# EAGLE board revA (EAGLE 9.6.2), part 1 of 2
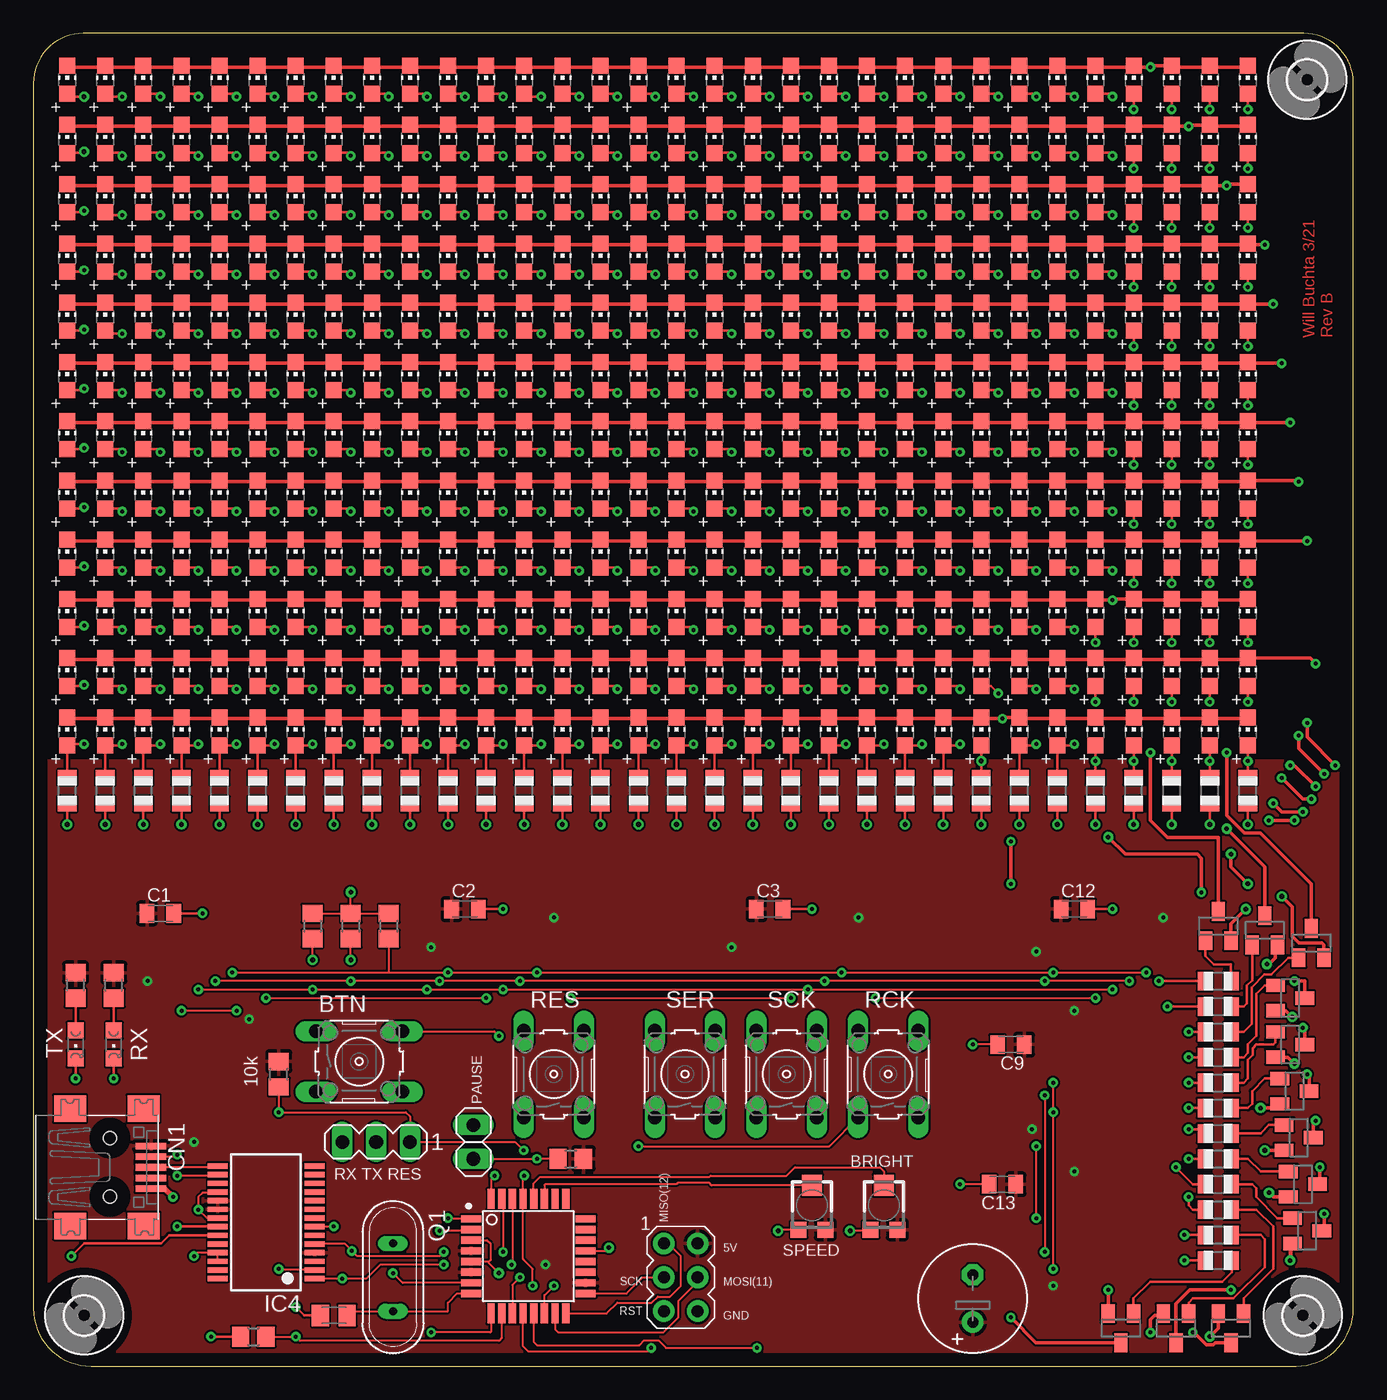
[diagram p0: board, top side]
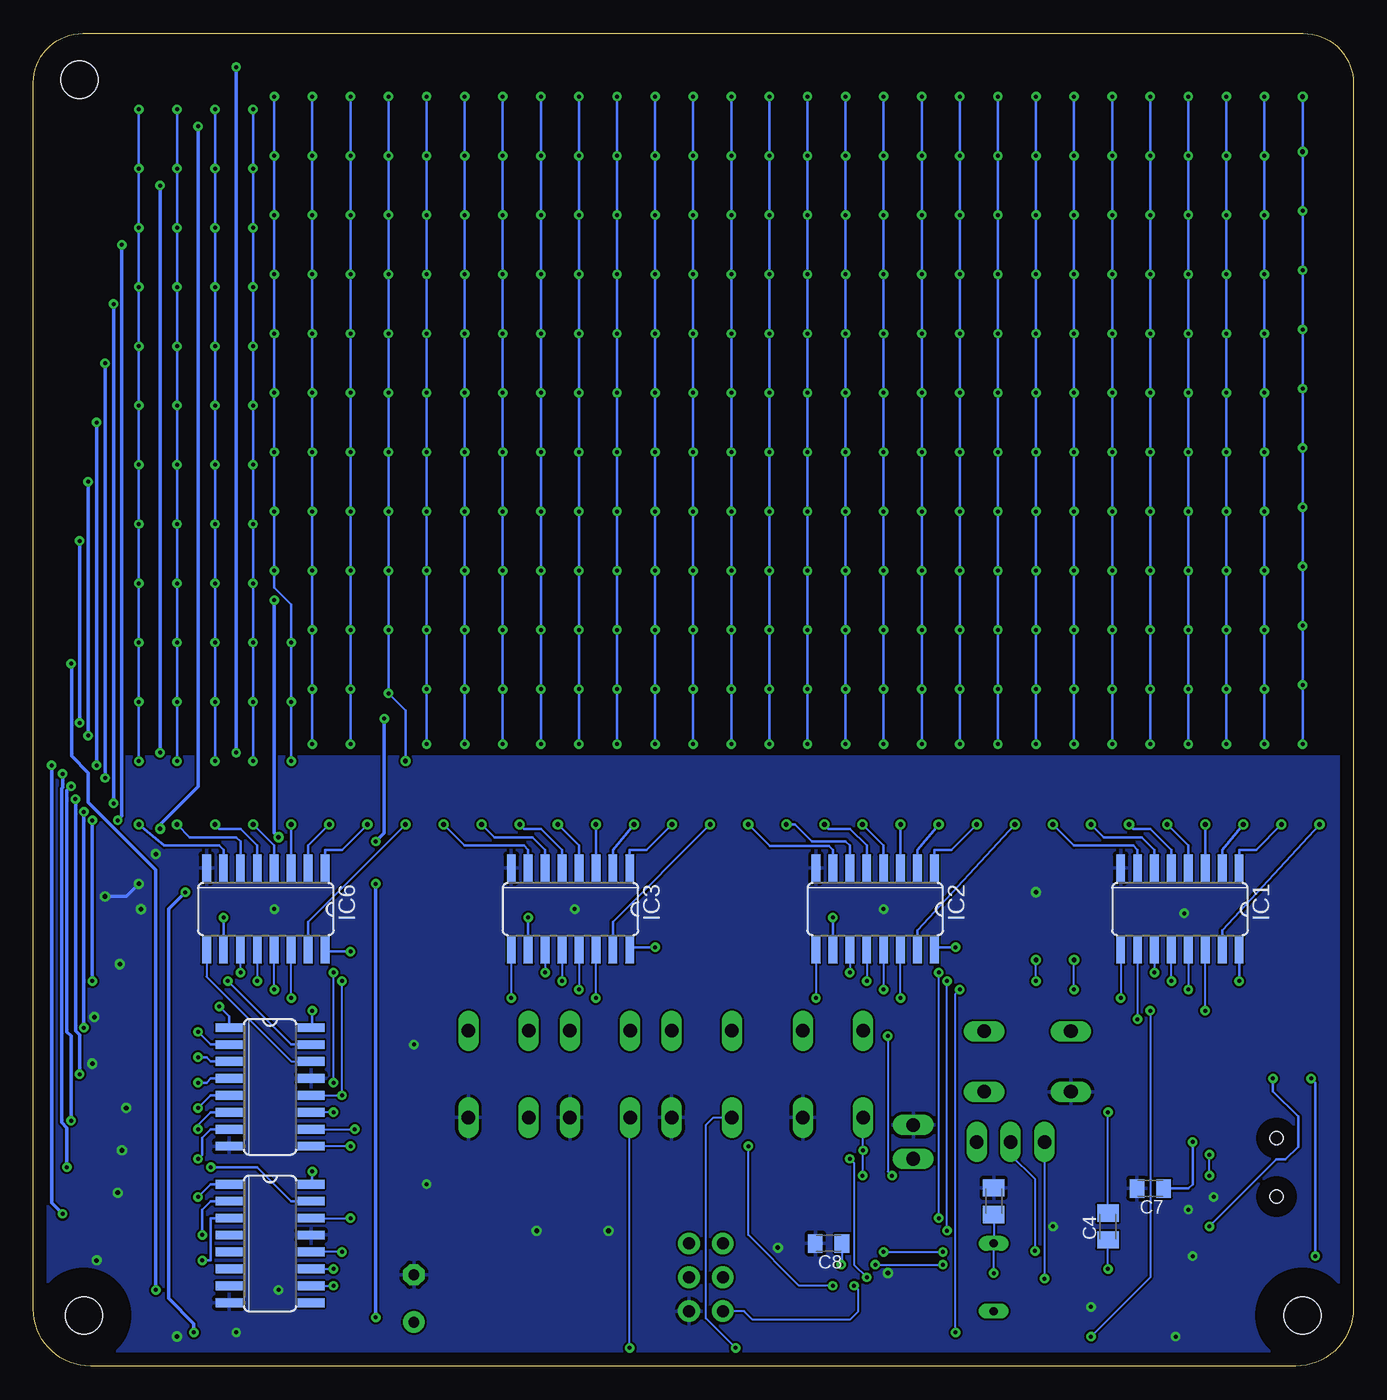
[diagram p1: board, bottom side, seen from below]

Size 99.04 x 100 mm. Coordinates in mm from the lower left corner, seen from the top.
Outline: 0,96.25 0,4.34 arc90 4.34,0 94.74,0 arc90 99.04,4.3 99.04,96.28 arc90 95.32,100 3.75,100 arc90 0,96.25
Copper layers (1*16): Top 0.035mm / dielectric 1.5mm / Bottom 0.035mm
Design rules "default *": minimum track width 6mil, minimum drill 0.3mm, track to track 6mil, track to pad 8mil, pad to pad 5mil, via to via 6mil, smd to smd 5mil, copper to edge 40mil, drill to drill 6mil, minimum pad ring 10mil, minimum via ring 8mil, stop-mask expansion 4mil, vias tented up to drill 0mil, thermal gap 10mil

## Footprints (pad centres in the part's own frame; a part is rotated, then mirrored left to right if it is on the bottom)
TC33X = smd 1.2 x 1.2: 1 -1,-1.825; 3 1,-1.825 | smd 1.5 x 1.6: 2 0,1.5
B3F-10XX = drill 1.016 long: 1 -3.251,2.261; 2 3.251,2.261; 3 -3.251,-2.261; 4 3.251,-2.261
C0805K = smd 1.1 x 1.4: 1 -1,0; 2 1,0
C0805K' = smd 1.3 x 1.6: 1 -1,0; 2 1,0
E3,5-8 = drill 0.813 pad 1.6: + -1.778,0 | drill 0.813 pad 1.6 octagon: - 1.778,0
USB-MINIB = smd 0.5 x 2.308: D+ 0,4.064; D- -0.8,4.064; GND 1.6,4.064; ID 0.8,4.064; VBUS -1.6,4.064 | smd 2 x 2.4: GND1 -4.4,-2; GND2 -4.4,3.5; GND3 4.4,3.5; GND4 4.4,-2 | hole 1: -2.2,1; 2.2,1
2,8 = hole 2.8: 0,0
SO16 = smd 0.66 x 2.032: 1 -4.445,-3.073; 2 -3.175,-3.073; 3 -1.905,-3.073; 4 -0.635,-3.073; 5 0.635,-3.073; 6 1.905,-3.073; 7 3.175,-3.073; 8 4.445,-3.073; 9 4.445,3.073; 10 3.175,3.073; 11 1.905,3.073; 12 0.635,3.073; 13 -0.635,3.073; 14 -1.905,3.073; 15 -3.175,3.073; 16 -4.445,3.073
SSOP28 = smd 0.4 x 1.5: 1 -4.225,-3.625; 2 -3.575,-3.625; 3 -2.925,-3.625; 4 -2.275,-3.625; 5 -1.625,-3.625; 6 -0.975,-3.625; 7 -0.325,-3.625; 8 0.325,-3.625; 9 0.975,-3.625; 10 1.625,-3.625; 11 2.275,-3.625; 12 2.925,-3.625; 13 3.575,-3.625; 14 4.225,-3.625; 15 4.225,3.625; 16 3.575,3.625; 17 2.925,3.625; 18 2.275,3.625; 19 1.625,3.625; 20 0.975,3.625; 21 0.325,3.625; 22 -0.325,3.625; 23 -0.975,3.625; 24 -1.625,3.625; 25 -2.275,3.625; 26 -2.925,3.625; 27 -3.575,3.625; 28 -4.225,3.625
AVRISP = drill 0.9 pad 1.626: 1 -1.27,2.54; 2 1.27,2.54; 3 -1.27,0; 4 1.27,0; 5 -1.27,-2.54; 6 1.27,-2.54
CHIP-LED0805 = smd 1.2 x 1.2: A 0,-1.05; C 0,1.05
1X02 = drill 1.016 long: 1 -1.27,0; 2 1.27,0
QS = drill 0.61 long: 1 -2.54,0; 2 2.54,0
SOT23 = smd 1 x 1.4: 1 -0.95,-1.1; 2 0.95,-1.1; 3 0,1.1
R0805 = smd 1.1 x 1.4: 1 -1,0; 2 1,0
R0805' = smd 1.3 x 1.5: 1 -0.95,0; 2 0.95,0
CHIPLED_0805 = smd 1.2 x 1.2: A 0,-1.05; C 0,1.05
MA03-1 = drill 1.016 long: 1 -2.54,0; 2 0,0; 3 2.54,0
QFP80P900X900X120-32N = smd 1.5 x 0.55: 1 -4.3,2.8; 2 -4.3,2; 3 -4.3,1.2; 4 -4.3,0.4; 5 -4.3,-0.4; 6 -4.3,-1.2; 7 -4.3,-2; 8 -4.3,-2.8; 17 4.3,-2.8; 18 4.3,-2; 19 4.3,-1.2; 20 4.3,-0.4; 21 4.3,0.4; 22 4.3,1.2; 23 4.3,2; 24 4.3,2.8 | smd 0.55 x 1.5: 9 -2.8,-4.3; 10 -2,-4.3; 11 -1.2,-4.3; 12 -0.4,-4.3; 13 0.4,-4.3; 14 1.2,-4.3; 15 2,-4.3; 16 2.8,-4.3; 25 2.8,4.3; 26 2,4.3; 27 1.2,4.3; 28 0.4,4.3; 29 -0.4,4.3; 30 -1.2,4.3; 31 -2,4.3; 32 -2.8,4.3

## Placement (x,y rotation side)
BRIGHT  [TC33X]  63.82,12.06 0 top
BTN  [B3F-10XX]  24.45,22.86 0 top
C1  0.1u  [C0805K]  9.53,33.97 0 top
C2  0.1u  [C0805K]  32.38,34.29 0 top
C3  0.1u  [C0805K]  55.24,34.29 0 top
C4  0.1  [C0805K']  18.41,10.48 90 bottom
C5  18pf  [C0805K']  26.99,12.38 90 bottom
C6  18pf  [C0805K']  22.54,3.81 180 top
C7  0.1u  [C0805K]  15.24,13.34 180 bottom
C8  0.1u  [C0805K]  39.37,9.21 180 bottom
C9  0.1u  [C0805K]  73.34,24.13 180 top
C10  680  [E3,5-8]  70.48,5.08 90 top
C12  0.1u  [C0805K]  78.11,34.29 0 top
C13  0.1u  [C0805K]  72.71,13.65 180 top
CN1  [USB-MINIB]  4.76,14.92 270 top
H1  MOUNT-HOLE2.8  [2,8]  95.57,96.52 0 top
H2  MOUNT-HOLE2.8  [2,8]  3.81,3.81 0 top
H3  MOUNT-HOLE2.8  [2,8]  95.25,3.81 0 top
IC1  74HC595D  [SO16]  13.02,34.29 180 bottom
IC2  74HC595D  [SO16]  35.88,34.29 180 bottom
IC3  74HC595D  [SO16]  58.74,34.29 180 bottom
IC4  FT232RL  [SSOP28]  17.46,10.79 90 top
IC5  74HC595D  [SO16]  81.28,20.95 270 bottom
IC6  74HC595D  [SO16]  81.6,34.29 180 bottom
IC7  74HC595D  [SO16]  81.28,9.21 270 bottom
ISP1  AVRISP-6  [AVRISP]  48.58,6.67 0 top
LED1  [CHIP-LED0805]  2.54,96.52 0 top
LED2  [CHIP-LED0805]  5.4,96.52 0 top
LED3  [CHIP-LED0805]  8.26,96.52 0 top
LED4  [CHIP-LED0805]  11.11,96.52 0 top
LED5  [CHIP-LED0805]  13.97,96.52 0 top
LED6  [CHIP-LED0805]  16.83,96.52 0 top
LED7  [CHIP-LED0805]  19.68,96.52 0 top
LED8  [CHIP-LED0805]  22.54,96.52 0 top
LED9  [CHIP-LED0805]  25.4,96.52 0 top
LED10  [CHIP-LED0805]  28.26,96.52 0 top
LED11  [CHIP-LED0805]  31.11,96.52 0 top
LED12  [CHIP-LED0805]  33.97,96.52 0 top
LED13  [CHIP-LED0805]  36.83,96.52 0 top
LED14  [CHIP-LED0805]  39.69,96.52 0 top
LED15  [CHIP-LED0805]  42.55,96.52 0 top
LED16  [CHIP-LED0805]  45.4,96.52 0 top
LED17  [CHIP-LED0805]  48.26,96.52 0 top
LED18  [CHIP-LED0805]  51.12,96.52 0 top
LED19  [CHIP-LED0805]  53.98,96.52 0 top
LED20  [CHIP-LED0805]  56.83,96.52 0 top
LED21  [CHIP-LED0805]  59.69,96.52 0 top
LED22  [CHIP-LED0805]  62.55,96.52 0 top
LED23  [CHIP-LED0805]  65.41,96.52 0 top
LED24  [CHIP-LED0805]  68.26,96.52 0 top
LED25  [CHIP-LED0805]  71.12,96.52 0 top
LED26  [CHIP-LED0805]  73.98,96.52 0 top
LED27  [CHIP-LED0805]  76.83,96.52 0 top
LED28  [CHIP-LED0805]  79.69,96.52 0 top
LED29  [CHIP-LED0805]  82.55,96.52 0 top
LED30  [CHIP-LED0805]  85.41,96.52 0 top
LED31  [CHIP-LED0805]  88.27,96.52 0 top
LED32  [CHIP-LED0805]  91.12,96.52 0 top
LED33  [CHIP-LED0805]  2.54,92.08 0 top
LED34  [CHIP-LED0805]  5.4,92.08 0 top
LED35  [CHIP-LED0805]  8.26,92.08 0 top
LED36  [CHIP-LED0805]  11.11,92.08 0 top
LED37  [CHIP-LED0805]  13.97,92.08 0 top
LED38  [CHIP-LED0805]  16.83,92.08 0 top
LED39  [CHIP-LED0805]  19.68,92.08 0 top
LED40  [CHIP-LED0805]  22.54,92.08 0 top
LED41  [CHIP-LED0805]  25.4,92.08 0 top
LED42  [CHIP-LED0805]  28.26,92.08 0 top
LED43  [CHIP-LED0805]  31.11,92.08 0 top
LED44  [CHIP-LED0805]  33.97,92.08 0 top
LED45  [CHIP-LED0805]  36.83,92.08 0 top
LED46  [CHIP-LED0805]  39.69,92.08 0 top
LED47  [CHIP-LED0805]  42.55,92.08 0 top
LED48  [CHIP-LED0805]  45.4,92.08 0 top
LED49  [CHIP-LED0805]  48.26,92.08 0 top
LED50  [CHIP-LED0805]  51.12,92.08 0 top
LED51  [CHIP-LED0805]  53.98,92.08 0 top
LED52  [CHIP-LED0805]  56.83,92.08 0 top
LED53  [CHIP-LED0805]  59.69,92.08 0 top
LED54  [CHIP-LED0805]  62.55,92.08 0 top
LED55  [CHIP-LED0805]  65.41,92.08 0 top
LED56  [CHIP-LED0805]  68.26,92.08 0 top
LED57  [CHIP-LED0805]  71.12,92.08 0 top
LED58  [CHIP-LED0805]  73.98,92.08 0 top
LED59  [CHIP-LED0805]  76.83,92.08 0 top
LED60  [CHIP-LED0805]  79.69,92.08 0 top
LED61  [CHIP-LED0805]  82.55,92.08 0 top
LED62  [CHIP-LED0805]  85.41,92.08 0 top
LED63  [CHIP-LED0805]  88.27,92.08 0 top
LED64  [CHIP-LED0805]  91.12,92.08 0 top
LED65  [CHIP-LED0805]  2.54,87.63 0 top
LED66  [CHIP-LED0805]  5.4,87.63 0 top
LED67  [CHIP-LED0805]  8.26,87.63 0 top
LED68  [CHIP-LED0805]  11.11,87.63 0 top
LED69  [CHIP-LED0805]  13.97,87.63 0 top
LED70  [CHIP-LED0805]  16.83,87.63 0 top
LED71  [CHIP-LED0805]  19.68,87.63 0 top
LED72  [CHIP-LED0805]  22.54,87.63 0 top
LED73  [CHIP-LED0805]  25.4,87.63 0 top
LED74  [CHIP-LED0805]  28.26,87.63 0 top
LED75  [CHIP-LED0805]  31.11,87.63 0 top
LED76  [CHIP-LED0805]  33.97,87.63 0 top
LED77  [CHIP-LED0805]  36.83,87.63 0 top
LED78  [CHIP-LED0805]  39.69,87.63 0 top
LED79  [CHIP-LED0805]  42.55,87.63 0 top
LED80  [CHIP-LED0805]  45.4,87.63 0 top
LED81  [CHIP-LED0805]  48.26,87.63 0 top
LED82  [CHIP-LED0805]  51.12,87.63 0 top
LED83  [CHIP-LED0805]  53.98,87.63 0 top
LED84  [CHIP-LED0805]  56.83,87.63 0 top
LED85  [CHIP-LED0805]  59.69,87.63 0 top
LED86  [CHIP-LED0805]  62.55,87.63 0 top
LED87  [CHIP-LED0805]  65.41,87.63 0 top
LED88  [CHIP-LED0805]  68.26,87.63 0 top
LED89  [CHIP-LED0805]  71.12,87.63 0 top
LED90  [CHIP-LED0805]  73.98,87.63 0 top
LED91  [CHIP-LED0805]  76.83,87.63 0 top
LED92  [CHIP-LED0805]  79.69,87.63 0 top
LED93  [CHIP-LED0805]  82.55,87.63 0 top
LED94  [CHIP-LED0805]  85.41,87.63 0 top
LED95  [CHIP-LED0805]  88.27,87.63 0 top
LED96  [CHIP-LED0805]  91.12,87.63 0 top
LED97  [CHIP-LED0805]  2.54,83.19 0 top
LED98  [CHIP-LED0805]  5.4,83.19 0 top
LED99  [CHIP-LED0805]  8.26,83.19 0 top
LED100  [CHIP-LED0805]  11.11,83.19 0 top
LED101  [CHIP-LED0805]  13.97,83.19 0 top
LED102  [CHIP-LED0805]  16.83,83.19 0 top
LED103  [CHIP-LED0805]  19.68,83.19 0 top
LED104  [CHIP-LED0805]  22.54,83.19 0 top
LED105  [CHIP-LED0805]  25.4,83.19 0 top
LED106  [CHIP-LED0805]  28.26,83.19 0 top
LED107  [CHIP-LED0805]  31.11,83.19 0 top
LED108  [CHIP-LED0805]  33.97,83.19 0 top
LED109  [CHIP-LED0805]  36.83,83.19 0 top
LED110  [CHIP-LED0805]  39.69,83.19 0 top
LED111  [CHIP-LED0805]  42.55,83.19 0 top
LED112  [CHIP-LED0805]  45.4,83.19 0 top
LED113  [CHIP-LED0805]  48.26,83.19 0 top
LED114  [CHIP-LED0805]  51.12,83.19 0 top
LED115  [CHIP-LED0805]  53.98,83.19 0 top
LED116  [CHIP-LED0805]  56.83,83.19 0 top
LED117  [CHIP-LED0805]  59.69,83.19 0 top
LED118  [CHIP-LED0805]  62.55,83.19 0 top
LED119  [CHIP-LED0805]  65.41,83.19 0 top
LED120  [CHIP-LED0805]  68.26,83.19 0 top
LED121  [CHIP-LED0805]  71.12,83.19 0 top
LED122  [CHIP-LED0805]  73.98,83.19 0 top
LED123  [CHIP-LED0805]  76.83,83.19 0 top
LED124  [CHIP-LED0805]  79.69,83.19 0 top
LED125  [CHIP-LED0805]  82.55,83.19 0 top
LED126  [CHIP-LED0805]  85.41,83.19 0 top
LED127  [CHIP-LED0805]  88.27,83.19 0 top
LED128  [CHIP-LED0805]  91.12,83.19 0 top
LED129  [CHIP-LED0805]  2.54,78.74 0 top
LED130  [CHIP-LED0805]  5.4,78.74 0 top
LED131  [CHIP-LED0805]  8.26,78.74 0 top
LED132  [CHIP-LED0805]  11.11,78.74 0 top
LED133  [CHIP-LED0805]  13.97,78.74 0 top
LED134  [CHIP-LED0805]  16.83,78.74 0 top
LED135  [CHIP-LED0805]  19.68,78.74 0 top
LED136  [CHIP-LED0805]  22.54,78.74 0 top
LED137  [CHIP-LED0805]  25.4,78.74 0 top
LED138  [CHIP-LED0805]  28.26,78.74 0 top
LED139  [CHIP-LED0805]  31.11,78.74 0 top
LED140  [CHIP-LED0805]  33.97,78.74 0 top
LED141  [CHIP-LED0805]  36.83,78.74 0 top
LED142  [CHIP-LED0805]  39.69,78.74 0 top
LED143  [CHIP-LED0805]  42.55,78.74 0 top
LED144  [CHIP-LED0805]  45.4,78.74 0 top
LED145  [CHIP-LED0805]  48.26,78.74 0 top
LED146  [CHIP-LED0805]  51.12,78.74 0 top
LED147  [CHIP-LED0805]  53.98,78.74 0 top
LED148  [CHIP-LED0805]  56.83,78.74 0 top
LED149  [CHIP-LED0805]  59.69,78.74 0 top
LED150  [CHIP-LED0805]  62.55,78.74 0 top
LED151  [CHIP-LED0805]  65.41,78.74 0 top
LED152  [CHIP-LED0805]  68.26,78.74 0 top
LED153  [CHIP-LED0805]  71.12,78.74 0 top
LED154  [CHIP-LED0805]  73.98,78.74 0 top
LED155  [CHIP-LED0805]  76.83,78.74 0 top
LED156  [CHIP-LED0805]  79.69,78.74 0 top
LED157  [CHIP-LED0805]  82.55,78.74 0 top
LED158  [CHIP-LED0805]  85.41,78.74 0 top
LED159  [CHIP-LED0805]  88.27,78.74 0 top
LED160  [CHIP-LED0805]  91.12,78.74 0 top
LED161  [CHIP-LED0805]  2.54,74.3 0 top
LED162  [CHIP-LED0805]  5.4,74.3 0 top
LED163  [CHIP-LED0805]  8.26,74.3 0 top
LED164  [CHIP-LED0805]  11.11,74.3 0 top
LED165  [CHIP-LED0805]  13.97,74.3 0 top
LED166  [CHIP-LED0805]  16.83,74.3 0 top
LED167  [CHIP-LED0805]  19.68,74.3 0 top
LED168  [CHIP-LED0805]  22.54,74.3 0 top
LED169  [CHIP-LED0805]  25.4,74.3 0 top
LED170  [CHIP-LED0805]  28.26,74.3 0 top
LED171  [CHIP-LED0805]  31.11,74.3 0 top
LED172  [CHIP-LED0805]  33.97,74.3 0 top
LED173  [CHIP-LED0805]  36.83,74.3 0 top
LED174  [CHIP-LED0805]  39.69,74.3 0 top
LED175  [CHIP-LED0805]  42.55,74.3 0 top
LED176  [CHIP-LED0805]  45.4,74.3 0 top
LED177  [CHIP-LED0805]  48.26,74.3 0 top
LED178  [CHIP-LED0805]  51.12,74.3 0 top
LED179  [CHIP-LED0805]  53.98,74.3 0 top
LED180  [CHIP-LED0805]  56.83,74.3 0 top
LED181  [CHIP-LED0805]  59.69,74.3 0 top
LED182  [CHIP-LED0805]  62.55,74.3 0 top
LED183  [CHIP-LED0805]  65.41,74.3 0 top
LED184  [CHIP-LED0805]  68.26,74.3 0 top
LED185  [CHIP-LED0805]  71.12,74.3 0 top
LED186  [CHIP-LED0805]  73.98,74.3 0 top
LED187  [CHIP-LED0805]  76.83,74.3 0 top
LED188  [CHIP-LED0805]  79.69,74.3 0 top
LED189  [CHIP-LED0805]  82.55,74.3 0 top
LED190  [CHIP-LED0805]  85.41,74.3 0 top
LED191  [CHIP-LED0805]  88.27,74.3 0 top
LED192  [CHIP-LED0805]  91.12,74.3 0 top
LED193  [CHIP-LED0805]  2.54,69.85 0 top
LED194  [CHIP-LED0805]  5.4,69.85 0 top
LED195  [CHIP-LED0805]  8.26,69.85 0 top
LED196  [CHIP-LED0805]  11.11,69.85 0 top
LED197  [CHIP-LED0805]  13.97,69.85 0 top
LED198  [CHIP-LED0805]  16.83,69.85 0 top
LED199  [CHIP-LED0805]  19.68,69.85 0 top
LED200  [CHIP-LED0805]  22.54,69.85 0 top
LED201  [CHIP-LED0805]  25.4,69.85 0 top
LED202  [CHIP-LED0805]  28.26,69.85 0 top
LED203  [CHIP-LED0805]  31.11,69.85 0 top
LED204  [CHIP-LED0805]  33.97,69.85 0 top
LED205  [CHIP-LED0805]  36.83,69.85 0 top
LED206  [CHIP-LED0805]  39.69,69.85 0 top
LED207  [CHIP-LED0805]  42.55,69.85 0 top
LED208  [CHIP-LED0805]  45.4,69.85 0 top
LED209  [CHIP-LED0805]  48.26,69.85 0 top
LED210  [CHIP-LED0805]  51.12,69.85 0 top
LED211  [CHIP-LED0805]  53.98,69.85 0 top
LED212  [CHIP-LED0805]  56.83,69.85 0 top
LED213  [CHIP-LED0805]  59.69,69.85 0 top
LED214  [CHIP-LED0805]  62.55,69.85 0 top
LED215  [CHIP-LED0805]  65.41,69.85 0 top
LED216  [CHIP-LED0805]  68.26,69.85 0 top
LED217  [CHIP-LED0805]  71.12,69.85 0 top
LED218  [CHIP-LED0805]  73.98,69.85 0 top
LED219  [CHIP-LED0805]  76.83,69.85 0 top
LED220  [CHIP-LED0805]  79.69,69.85 0 top
LED221  [CHIP-LED0805]  82.55,69.85 0 top
LED222  [CHIP-LED0805]  85.41,69.85 0 top
LED223  [CHIP-LED0805]  88.27,69.85 0 top
LED224  [CHIP-LED0805]  91.12,69.85 0 top
LED225  [CHIP-LED0805]  2.54,65.41 0 top
LED226  [CHIP-LED0805]  5.4,65.41 0 top
LED227  [CHIP-LED0805]  8.26,65.41 0 top
LED228  [CHIP-LED0805]  11.11,65.41 0 top
LED229  [CHIP-LED0805]  13.97,65.41 0 top
LED230  [CHIP-LED0805]  16.83,65.41 0 top
LED231  [CHIP-LED0805]  19.68,65.41 0 top
LED232  [CHIP-LED0805]  22.54,65.41 0 top
LED233  [CHIP-LED0805]  25.4,65.41 0 top
LED234  [CHIP-LED0805]  28.26,65.41 0 top
LED235  [CHIP-LED0805]  31.11,65.41 0 top
LED236  [CHIP-LED0805]  33.97,65.41 0 top
LED237  [CHIP-LED0805]  36.83,65.41 0 top
LED238  [CHIP-LED0805]  39.69,65.41 0 top
LED239  [CHIP-LED0805]  42.55,65.41 0 top
LED240  [CHIP-LED0805]  45.4,65.41 0 top
LED241  [CHIP-LED0805]  48.26,65.41 0 top
LED242  [CHIP-LED0805]  51.12,65.41 0 top
LED243  [CHIP-LED0805]  53.98,65.41 0 top
LED244  [CHIP-LED0805]  56.83,65.41 0 top
LED245  [CHIP-LED0805]  59.69,65.41 0 top
LED246  [CHIP-LED0805]  62.55,65.41 0 top
LED247  [CHIP-LED0805]  65.41,65.41 0 top
LED248  [CHIP-LED0805]  68.26,65.41 0 top
LED249  [CHIP-LED0805]  71.12,65.41 0 top
LED250  [CHIP-LED0805]  73.98,65.41 0 top
LED251  [CHIP-LED0805]  76.83,65.41 0 top
LED252  [CHIP-LED0805]  79.69,65.41 0 top
LED253  [CHIP-LED0805]  82.55,65.41 0 top
LED254  [CHIP-LED0805]  85.41,65.41 0 top
LED255  [CHIP-LED0805]  88.27,65.41 0 top
LED256  [CHIP-LED0805]  91.12,65.41 0 top
LED257  [CHIP-LED0805]  2.54,60.96 0 top
LED258  [CHIP-LED0805]  5.4,60.96 0 top
LED259  [CHIP-LED0805]  8.26,60.96 0 top
LED260  [CHIP-LED0805]  11.11,60.96 0 top
LED261  [CHIP-LED0805]  13.97,60.96 0 top
LED262  [CHIP-LED0805]  16.83,60.96 0 top
LED263  [CHIP-LED0805]  19.68,60.96 0 top
LED264  [CHIP-LED0805]  22.54,60.96 0 top
LED265  [CHIP-LED0805]  25.4,60.96 0 top
LED266  [CHIP-LED0805]  28.26,60.96 0 top
LED267  [CHIP-LED0805]  31.11,60.96 0 top
LED268  [CHIP-LED0805]  33.97,60.96 0 top
LED269  [CHIP-LED0805]  36.83,60.96 0 top
LED270  [CHIP-LED0805]  39.69,60.96 0 top
LED271  [CHIP-LED0805]  42.55,60.96 0 top
LED272  [CHIP-LED0805]  45.4,60.96 0 top
LED273  [CHIP-LED0805]  48.26,60.96 0 top
LED274  [CHIP-LED0805]  51.12,60.96 0 top
LED275  [CHIP-LED0805]  53.98,60.96 0 top
LED276  [CHIP-LED0805]  56.83,60.96 0 top
LED277  [CHIP-LED0805]  59.69,60.96 0 top
LED278  [CHIP-LED0805]  62.55,60.96 0 top
LED279  [CHIP-LED0805]  65.41,60.96 0 top
LED280  [CHIP-LED0805]  68.26,60.96 0 top
LED281  [CHIP-LED0805]  71.12,60.96 0 top
LED282  [CHIP-LED0805]  73.98,60.96 0 top
LED283  [CHIP-LED0805]  76.83,60.96 0 top
LED284  [CHIP-LED0805]  79.69,60.96 0 top
LED285  [CHIP-LED0805]  82.55,60.96 0 top
LED286  [CHIP-LED0805]  85.41,60.96 0 top
LED287  [CHIP-LED0805]  88.27,60.96 0 top
LED288  [CHIP-LED0805]  91.12,60.96 0 top
LED289  [CHIP-LED0805]  2.54,56.52 0 top
LED290  [CHIP-LED0805]  5.4,56.52 0 top
LED291  [CHIP-LED0805]  8.26,56.52 0 top
LED292  [CHIP-LED0805]  11.11,56.52 0 top
LED293  [CHIP-LED0805]  13.97,56.52 0 top
LED294  [CHIP-LED0805]  16.83,56.52 0 top
LED295  [CHIP-LED0805]  19.68,56.52 0 top
LED296  [CHIP-LED0805]  22.54,56.52 0 top
LED297  [CHIP-LED0805]  25.4,56.52 0 top
LED298  [CHIP-LED0805]  28.26,56.52 0 top
LED299  [CHIP-LED0805]  31.11,56.52 0 top
LED300  [CHIP-LED0805]  33.97,56.52 0 top
LED301  [CHIP-LED0805]  36.83,56.52 0 top
LED302  [CHIP-LED0805]  39.69,56.52 0 top
LED303  [CHIP-LED0805]  42.55,56.52 0 top
LED304  [CHIP-LED0805]  45.4,56.52 0 top
LED305  [CHIP-LED0805]  48.26,56.52 0 top
LED306  [CHIP-LED0805]  51.12,56.52 0 top
LED307  [CHIP-LED0805]  53.98,56.52 0 top
LED308  [CHIP-LED0805]  56.83,56.52 0 top
LED309  [CHIP-LED0805]  59.69,56.52 0 top
LED310  [CHIP-LED0805]  62.55,56.52 0 top
LED311  [CHIP-LED0805]  65.41,56.52 0 top
LED312  [CHIP-LED0805]  68.26,56.52 0 top
LED313  [CHIP-LED0805]  71.12,56.52 0 top
LED314  [CHIP-LED0805]  73.98,56.52 0 top
LED315  [CHIP-LED0805]  76.83,56.52 0 top
LED316  [CHIP-LED0805]  79.69,56.52 0 top
LED317  [CHIP-LED0805]  82.55,56.52 0 top
LED318  [CHIP-LED0805]  85.41,56.52 0 top
LED319  [CHIP-LED0805]  88.27,56.52 0 top
LED320  [CHIP-LED0805]  91.12,56.52 0 top
LED321  [CHIP-LED0805]  2.54,52.07 0 top
LED322  [CHIP-LED0805]  5.4,52.07 0 top
LED323  [CHIP-LED0805]  8.26,52.07 0 top
LED324  [CHIP-LED0805]  11.11,52.07 0 top
LED325  [CHIP-LED0805]  13.97,52.07 0 top
LED326  [CHIP-LED0805]  16.83,52.07 0 top
LED327  [CHIP-LED0805]  19.68,52.07 0 top
LED328  [CHIP-LED0805]  22.54,52.07 0 top
LED329  [CHIP-LED0805]  25.4,52.07 0 top
LED330  [CHIP-LED0805]  28.26,52.07 0 top
LED331  [CHIP-LED0805]  31.11,52.07 0 top
LED332  [CHIP-LED0805]  33.97,52.07 0 top
LED333  [CHIP-LED0805]  36.83,52.07 0 top
LED334  [CHIP-LED0805]  39.69,52.07 0 top
LED335  [CHIP-LED0805]  42.55,52.07 0 top
LED336  [CHIP-LED0805]  45.4,52.07 0 top
LED337  [CHIP-LED0805]  48.26,52.07 0 top
LED338  [CHIP-LED0805]  51.12,52.07 0 top
LED339  [CHIP-LED0805]  53.98,52.07 0 top
LED340  [CHIP-LED0805]  56.83,52.07 0 top
LED341  [CHIP-LED0805]  59.69,52.07 0 top
LED342  [CHIP-LED0805]  62.55,52.07 0 top
LED343  [CHIP-LED0805]  65.41,52.07 0 top
LED344  [CHIP-LED0805]  68.26,52.07 0 top
LED345  [CHIP-LED0805]  71.12,52.07 0 top
LED346  [CHIP-LED0805]  73.98,52.07 0 top
LED347  [CHIP-LED0805]  76.83,52.07 0 top
LED348  [CHIP-LED0805]  79.69,52.07 0 top
LED349  [CHIP-LED0805]  82.55,52.07 0 top
LED350  [CHIP-LED0805]  85.41,52.07 0 top
LED351  [CHIP-LED0805]  88.27,52.07 0 top
LED352  [CHIP-LED0805]  91.12,52.07 0 top
LED353  [CHIP-LED0805]  2.54,47.62 0 top
LED354  [CHIP-LED0805]  5.4,47.62 0 top
LED355  [CHIP-LED0805]  8.26,47.62 0 top
LED356  [CHIP-LED0805]  11.11,47.62 0 top
LED357  [CHIP-LED0805]  13.97,47.62 0 top
LED358  [CHIP-LED0805]  16.83,47.62 0 top
LED359  [CHIP-LED0805]  19.68,47.62 0 top
LED360  [CHIP-LED0805]  22.54,47.62 0 top
LED361  [CHIP-LED0805]  25.4,47.62 0 top
LED362  [CHIP-LED0805]  28.26,47.62 0 top
LED363  [CHIP-LED0805]  31.11,47.62 0 top
LED364  [CHIP-LED0805]  33.97,47.62 0 top
LED365  [CHIP-LED0805]  36.83,47.62 0 top
LED366  [CHIP-LED0805]  39.69,47.62 0 top
LED367  [CHIP-LED0805]  42.55,47.62 0 top
LED368  [CHIP-LED0805]  45.4,47.62 0 top
LED369  [CHIP-LED0805]  48.26,47.62 0 top
LED370  [CHIP-LED0805]  51.12,47.62 0 top
LED371  [CHIP-LED0805]  53.98,47.62 0 top
LED372  [CHIP-LED0805]  56.83,47.62 0 top
LED373  [CHIP-LED0805]  59.69,47.62 0 top
LED374  [CHIP-LED0805]  62.55,47.62 0 top
LED375  [CHIP-LED0805]  65.41,47.62 0 top
LED376  [CHIP-LED0805]  68.26,47.62 0 top
LED377  [CHIP-LED0805]  71.12,47.62 0 top
LED378  [CHIP-LED0805]  73.98,47.62 0 top
LED379  [CHIP-LED0805]  76.83,47.62 0 top
LED380  [CHIP-LED0805]  79.69,47.62 0 top
LED381  [CHIP-LED0805]  82.55,47.62 0 top
LED382  [CHIP-LED0805]  85.41,47.62 0 top
LED383  [CHIP-LED0805]  88.27,47.62 0 top
LED384  [CHIP-LED0805]  91.12,47.62 0 top
PAUSE  [1X02]  33.02,16.83 90 top
POT2  [TC33X]  58.42,12.06 0 top
Q1  [QS]  26.99,6.67 270 top
Q2  [SOT23]  88.9,33.02 0 top
Q3  [SOT23]  92.39,32.7 0 top
Q4  [SOT23]  95.89,31.75 0 top
Q5  [SOT23]  94.3,27.62 270 top
Q6  [SOT23]  94.3,24.13 270 top
Q7  [SOT23]  94.61,20.64 270 top
Q8  [SOT23]  94.93,17.14 270 top
Q9  [SOT23]  95.25,13.65 270 top
Q10  [SOT23]  95.57,10.16 270 top
Q11  [SOT23]  89.85,2.86 180 top
Q12  [SOT23]  85.72,2.86 180 top
Q13  [SOT23]  81.6,2.86 180 top
R1  200  [R0805]  2.54,43.18 90 top
R2  200  [R0805]  5.4,43.18 90 top
R3  200  [R0805]  8.26,43.18 90 top
R4  200  [R0805]  11.11,43.18 90 top
R5  200  [R0805]  13.97,43.18 90 top
R6  200  [R0805]  16.83,43.18 90 top
R7  200  [R0805]  19.68,43.18 90 top
R8  200  [R0805]  22.54,43.18 90 top
R9  200  [R0805]  25.4,43.18 90 top
R10  200  [R0805]  28.26,43.18 90 top
R11  200  [R0805]  31.11,43.18 90 top
R12  200  [R0805]  33.97,43.18 90 top
R13  200  [R0805]  36.83,43.18 90 top
R14  200  [R0805]  39.69,43.18 90 top
R15  200  [R0805]  42.55,43.18 90 top
R16  200  [R0805]  45.4,43.18 90 top
R17  200  [R0805]  48.26,43.18 90 top
R18  200  [R0805]  51.12,43.18 90 top
R19  200  [R0805]  53.98,43.18 90 top
R20  200  [R0805]  56.83,43.18 90 top
R21  200  [R0805]  59.69,43.18 90 top
R22  200  [R0805]  62.55,43.18 90 top
R23  200  [R0805]  65.41,43.18 90 top
R24  200  [R0805]  68.26,43.18 90 top
R25  1k  [R0805']  3.17,28.57 90 top
R26  1k  [R0805']  6.03,28.57 90 top
R27  10k  [R0805']  18.41,21.91 90 top
R28  [R0805]  88.9,28.89 0 top
R29  [R0805]  88.9,26.99 0 top
R30  [R0805]  88.9,25.08 0 top
R31  [R0805]  88.9,23.18 0 top
R32  [R0805]  88.9,21.27 0 top
R33  [R0805]  88.9,19.37 0 top
R34  [R0805]  88.9,17.46 0 top
R35  [R0805]  88.9,15.56 0 top
R44  10k  [R0805']  16.51,2.22 0 top
R45  10k  [R0805']  26.67,33.02 270 top
R46  10k  [R0805']  23.81,33.02 270 top
R47  10k  [R0805']  20.95,33.02 270 top
R48  10k  [R0805']  40.32,15.56 0 top
R49  200  [R0805]  71.12,43.18 90 top
R50  200  [R0805]  73.98,43.18 90 top
R51  200  [R0805]  76.83,43.18 90 top
R52  200  [R0805]  79.69,43.18 90 top
R53  200  [R0805]  82.55,43.18 90 top
R54  200  [R0805]  85.41,43.18 90 top
R55  200  [R0805]  88.27,43.18 90 top
R56  200  [R0805]  91.12,43.18 90 top
R57  [R0805]  88.9,13.65 0 top
R58  [R0805]  88.9,11.75 0 top
R59  [R0805]  88.9,9.84 0 top
R60  [R0805]  88.9,7.94 0 top
RCK  [B3F-10XX]  64.14,21.91 90 top
RES  [B3F-10XX]  39.05,21.91 90 top
RX  [CHIPLED_0805]  6.03,24.13 180 top
SCK  [B3F-10XX]  56.52,21.91 90 top
SER  [B3F-10XX]  48.9,21.91 90 top
SV2  [MA03-1]  25.72,16.83 180 top
TX  [CHIPLED_0805]  3.17,24.13 180 top
U1  ATMEGA328P-AU  [QFP80P900X900X120-32N]  37.15,8.26 0 top

## Library data of the parts
BRIGHT C1-C3 C7-C9 C12 C13 CN1 ISP1 LED1-LED384 POT2 Q2-Q13 R1-R24 R28-R35 R49-R60 RX TX = adafruit
BTN RCK RES SCK SER = switch-omron; MPN: B3F-1000; OC_FARNELL: 176432; OC_NEWARK: 36M3542
C4-C6 C10 = rcl; SPICEPREFIX: C
H1-H3 = holes
IC1-IC3 IC5-IC7 = 74xx-eu
IC4 = ftdichip; MPN: FT232RL; OC_FARNELL: 1146032; OC_NEWARK: 91K9918
PAUSE = pinhead
Q1 = special
R25-R27 R44-R48 = rcl; SPICEPREFIX: R
SV2 = con-lstb; OC_FARNELL: unknown; OC_NEWARK: unknown
U1 = ATMEGA328P-AU; AVAILABILITY: Warning; DESCRIPTION: AVR AVR® ATmega Microcontroller IC 8-Bit 20MHz 32KB (16K x 16) FLASH 32-TQFP (7x7); MF: Microchip Technology; MP: ATMEGA328P-AU; PACKAGE: TQFP-32 Microchip; PRICE: None; PURCHASE-URL: https://pricing.snapeda.com/search/part/ATMEGA328P-AU/?ref=eda

## Nets
/OE: IC1.13 IC2.13 IC3.13 IC6.13 R47.2 U1.9
BRCK: RCK.1 U1.14
BSCK: SCK.1 U1.13
BSER: SER.1 U1.12
BTN: BTN.2 U1.32
C1: LED1.A LED33.A LED65.A LED97.A LED129.A LED161.A LED193.A LED225.A LED257.A LED289.A LED321.A LED353.A R1.2
C2: LED2.A LED34.A LED66.A LED98.A LED130.A LED162.A LED194.A LED226.A LED258.A LED290.A LED322.A LED354.A R2.2
C3: LED3.A LED35.A LED67.A LED99.A LED131.A LED163.A LED195.A LED227.A LED259.A LED291.A LED323.A LED355.A R3.2
C4: LED4.A LED36.A LED68.A LED100.A LED132.A LED164.A LED196.A LED228.A LED260.A LED292.A LED324.A LED356.A R4.2
C5: LED5.A LED37.A LED69.A LED101.A LED133.A LED165.A LED197.A LED229.A LED261.A LED293.A LED325.A LED357.A R5.2
C6: LED6.A LED38.A LED70.A LED102.A LED134.A LED166.A LED198.A LED230.A LED262.A LED294.A LED326.A LED358.A R6.2
C7: LED7.A LED39.A LED71.A LED103.A LED135.A LED167.A LED199.A LED231.A LED263.A LED295.A LED327.A LED359.A R7.2
C8: LED8.A LED40.A LED72.A LED104.A LED136.A LED168.A LED200.A LED232.A LED264.A LED296.A LED328.A LED360.A R8.2
C9: LED9.A LED41.A LED73.A LED105.A LED137.A LED169.A LED201.A LED233.A LED265.A LED297.A LED329.A LED361.A R9.2
C10: LED10.A LED42.A LED74.A LED106.A LED138.A LED170.A LED202.A LED234.A LED266.A LED298.A LED330.A LED362.A R10.2
C11: LED11.A LED43.A LED75.A LED107.A LED139.A LED171.A LED203.A LED235.A LED267.A LED299.A LED331.A LED363.A R11.2
C12: LED12.A LED44.A LED76.A LED108.A LED140.A LED172.A LED204.A LED236.A LED268.A LED300.A LED332.A LED364.A R12.2
C13: LED13.A LED45.A LED77.A LED109.A LED141.A LED173.A LED205.A LED237.A LED269.A LED301.A LED333.A LED365.A R13.2
C14: LED14.A LED46.A LED78.A LED110.A LED142.A LED174.A LED206.A LED238.A LED270.A LED302.A LED334.A LED366.A R14.2
C15: LED15.A LED47.A LED79.A LED111.A LED143.A LED175.A LED207.A LED239.A LED271.A LED303.A LED335.A LED367.A R15.2
C16: LED16.A LED48.A LED80.A LED112.A LED144.A LED176.A LED208.A LED240.A LED272.A LED304.A LED336.A LED368.A R16.2
C17: LED17.A LED49.A LED81.A LED113.A LED145.A LED177.A LED209.A LED241.A LED273.A LED305.A LED337.A LED369.A R17.2
C18: LED18.A LED50.A LED82.A LED114.A LED146.A LED178.A LED210.A LED242.A LED274.A LED306.A LED338.A LED370.A R18.2
C19: LED19.A LED51.A LED83.A LED115.A LED147.A LED179.A LED211.A LED243.A LED275.A LED307.A LED339.A LED371.A R19.2
C20: LED20.A LED52.A LED84.A LED116.A LED148.A LED180.A LED212.A LED244.A LED276.A LED308.A LED340.A LED372.A R20.2
C21: LED21.A LED53.A LED85.A LED117.A LED149.A LED181.A LED213.A LED245.A LED277.A LED309.A LED341.A LED373.A R21.2
C22: LED22.A LED54.A LED86.A LED118.A LED150.A LED182.A LED214.A LED246.A LED278.A LED310.A LED342.A LED374.A R22.2
C23: LED23.A LED55.A LED87.A LED119.A LED151.A LED183.A LED215.A LED247.A LED279.A LED311.A LED343.A LED375.A R23.2
C24: LED24.A LED56.A LED88.A LED120.A LED152.A LED184.A LED216.A LED248.A LED280.A LED312.A LED344.A LED376.A R24.2
C25: LED25.A LED57.A LED89.A LED121.A LED153.A LED185.A LED217.A LED249.A LED281.A LED313.A LED345.A LED377.A R49.2
C26: LED26.A LED58.A LED90.A LED122.A LED154.A LED186.A LED218.A LED250.A LED282.A LED314.A LED346.A LED378.A R50.2
C27: LED27.A LED59.A LED91.A LED123.A LED155.A LED187.A LED219.A LED251.A LED283.A LED315.A LED347.A LED379.A R51.2
C28: LED28.A LED60.A LED92.A LED124.A LED156.A LED188.A LED220.A LED252.A LED284.A LED316.A LED348.A LED380.A R52.2
C29: LED29.A LED61.A LED93.A LED125.A LED157.A LED189.A LED221.A LED253.A LED285.A LED317.A LED349.A LED381.A R53.2
C30: LED30.A LED62.A LED94.A LED126.A LED158.A LED190.A LED222.A LED254.A LED286.A LED318.A LED350.A LED382.A R54.2
C31: LED31.A LED63.A LED95.A LED127.A LED159.A LED191.A LED223.A LED255.A LED287.A LED319.A LED351.A LED383.A R55.2
C32: LED32.A LED64.A LED96.A LED128.A LED160.A LED192.A LED224.A LED256.A LED288.A LED320.A LED352.A LED384.A R56.2
DTR: C4.2 ISP1.5 R27.1 RES.1 SV2.1 U1.29
FT_RX: IC4.5 SV2.2 U1.31
FT_TX: IC4.1 SV2.3 U1.30
GND: BRIGHT.1 BTN.3 C1.2 C2.2 C3.2 C5.2 C6.2 C7.2 C8.2 C9.2 C10.- C12.2 C13.2 CN1.GND IC1.8 IC2.8 IC3.8 IC4.7 IC4.18 IC4.21 IC4.25 IC4.26 IC5.8 IC5.13 IC6.8 IC7.8 IC7.13 ISP1.6 PAUSE.2 POT2.1 Q2.2 Q3.2 Q4.2 Q5.2 Q6.2 Q7.2 Q8.2 Q9.2 Q10.2 Q11.2 Q12.2 Q13.2 R44.1 R45.1 R46.1 R47.1 RCK.3 RES.3 SCK.3 SER.3 U1.3 U1.5 U1.21
MCU_EN: PAUSE.1 R48.1 U1.11
MISO: ISP1.1 U1.16
MOSI: ISP1.4 U1.15
N$1: IC1.9 IC2.14
N$2: IC1.15 R1.1
N$3: IC1.1 R2.1
N$4: IC1.2 R3.1
N$5: IC1.3 R4.1
N$6: IC1.4 R5.1
N$7: IC1.5 R6.1
N$8: IC1.6 R7.1
N$9: IC1.7 R8.1
N$10: IC2.15 R9.1
N$11: IC2.1 R10.1
N$12: IC2.2 R11.1
N$13: IC2.3 R12.1
N$14: IC2.4 R13.1
N$15: IC2.5 R14.1
N$16: IC2.6 R15.1
N$17: IC2.7 R16.1
N$18: IC2.9 IC3.14
N$19: IC3.15 R17.1
N$20: IC3.1 R18.1
N$21: IC3.2 R19.1
N$22: IC3.3 R20.1
N$23: IC3.4 R21.1
N$24: IC3.5 R22.1
N$25: IC3.6 R23.1
N$26: IC3.7 R24.1
N$27: CN1.D+ IC4.15
N$28: CN1.D- IC4.16
N$29: IC4.23 TX.C
N$30: IC4.22 RX.C
N$31: R25.1 TX.A
N$32: R26.1 RX.A
N$33: C6.1 Q1.2 U1.8
N$34: C5.1 Q1.1 U1.7
N$35: IC3.9 IC6.14
N$36: IC6.15 R49.1
N$37: IC5.15 R28.1
N$38: IC5.1 R29.1
N$39: IC5.2 R30.1
N$40: IC5.3 R31.1
N$41: IC5.4 R32.1
N$42: IC5.5 R33.1
N$43: IC5.6 R34.1
N$44: IC5.7 R35.1
N$45: Q2.1 R28.2
N$46: Q3.1 R29.2
N$47: Q4.1 R30.2
N$48: Q5.1 R31.2
N$49: Q6.1 R32.2
N$50: Q7.1 R33.2
N$51: Q8.1 R34.2
N$52: Q9.1 R35.2
N$53: IC6.1 R50.1
N$54: IC6.2 R51.1
N$55: IC6.3 R52.1
N$56: IC6.4 R53.1
N$57: IC6.5 R54.1
N$58: IC6.6 R55.1
N$59: IC6.7 R56.1
N$60: IC5.14 IC6.9
N$61: IC7.15 R57.1
N$62: IC7.1 R58.1
N$63: IC7.2 R59.1
N$64: IC7.3 R60.1
N$69: C4.1 IC4.2
N$70: Q10.1 R57.2
N$71: Q11.1 R58.2
N$72: Q12.1 R59.2
N$73: Q13.1 R60.2
N$78: IC5.9 IC7.14
POT: BRIGHT.2 U1.28
RCK: IC1.12 IC2.12 IC3.12 IC5.12 IC6.12 IC7.12 R46.2 U1.2
SCK: IC1.11 IC2.11 IC3.11 IC5.11 IC6.11 IC7.11 R45.2 U1.1
SER: IC1.14 R44.2 U1.10
SPEED: POT2.2 U1.27
SPI_SCK: ISP1.3 U1.17
VCC: BRIGHT.3 C1.1 C2.1 C3.1 C7.1 C8.1 C9.1 C10.+ C12.1 C13.1 CN1.VBUS IC1.10 IC1.16 IC2.10 IC2.16 IC3.10 IC3.16 IC4.4 IC4.19 IC4.20 IC5.10 IC5.16 IC6.10 IC6.16 IC7.10 IC7.16 ISP1.2 POT2.3 R25.2 R26.2 R27.2 R48.2 U1.4 U1.6 U1.18
X1: LED1.C LED2.C LED3.C LED4.C LED5.C LED6.C LED7.C LED8.C LED9.C LED10.C LED11.C LED12.C LED13.C LED14.C LED15.C LED16.C LED17.C LED18.C LED19.C LED20.C LED21.C LED22.C LED23.C LED24.C LED25.C LED26.C LED27.C LED28.C LED29.C LED30.C LED31.C LED32.C Q2.3
X2: LED33.C LED34.C LED35.C LED36.C LED37.C LED38.C LED39.C LED40.C LED41.C LED42.C LED43.C LED44.C LED45.C LED46.C LED47.C LED48.C LED49.C LED50.C LED51.C LED52.C LED53.C LED54.C LED55.C LED56.C LED57.C LED58.C LED59.C LED60.C LED61.C LED62.C LED63.C LED64.C Q3.3
X3: LED65.C LED66.C LED67.C LED68.C LED69.C LED70.C LED71.C LED72.C LED73.C LED74.C LED75.C LED76.C LED77.C LED78.C LED79.C LED80.C LED81.C LED82.C LED83.C LED84.C LED85.C LED86.C LED87.C LED88.C LED89.C LED90.C LED91.C LED92.C LED93.C LED94.C LED95.C LED96.C Q4.3
X4: LED97.C LED98.C LED99.C LED100.C LED101.C LED102.C LED103.C LED104.C LED105.C LED106.C LED107.C LED108.C LED109.C LED110.C LED111.C LED112.C LED113.C LED114.C LED115.C LED116.C LED117.C LED118.C LED119.C LED120.C LED121.C LED122.C LED123.C LED124.C LED125.C LED126.C LED127.C LED128.C Q5.3
X5: LED129.C LED130.C LED131.C LED132.C LED133.C LED134.C LED135.C LED136.C LED137.C LED138.C LED139.C LED140.C LED141.C LED142.C LED143.C LED144.C LED145.C LED146.C LED147.C LED148.C LED149.C LED150.C LED151.C LED152.C LED153.C LED154.C LED155.C LED156.C LED157.C LED158.C LED159.C LED160.C Q6.3
X6: LED161.C LED162.C LED163.C LED164.C LED165.C LED166.C LED167.C LED168.C LED169.C LED170.C LED171.C LED172.C LED173.C LED174.C LED175.C LED176.C LED177.C LED178.C LED179.C LED180.C LED181.C LED182.C LED183.C LED184.C LED185.C LED186.C LED187.C LED188.C LED189.C LED190.C LED191.C LED192.C Q7.3
X7: LED193.C LED194.C LED195.C LED196.C LED197.C LED198.C LED199.C LED200.C LED201.C LED202.C LED203.C LED204.C LED205.C LED206.C LED207.C LED208.C LED209.C LED210.C LED211.C LED212.C LED213.C LED214.C LED215.C LED216.C LED217.C LED218.C LED219.C LED220.C LED221.C LED222.C LED223.C LED224.C Q8.3
X8: LED225.C LED226.C LED227.C LED228.C LED229.C LED230.C LED231.C LED232.C LED233.C LED234.C LED235.C LED236.C LED237.C LED238.C LED239.C LED240.C LED241.C LED242.C LED243.C LED244.C LED245.C LED246.C LED247.C LED248.C LED249.C LED250.C LED251.C LED252.C LED253.C LED254.C LED255.C LED256.C Q9.3
X9: LED257.C LED258.C LED259.C LED260.C LED261.C LED262.C LED263.C LED264.C LED265.C LED266.C LED267.C LED268.C LED269.C LED270.C LED271.C LED272.C LED273.C LED274.C LED275.C LED276.C LED277.C LED278.C LED279.C LED280.C LED281.C LED282.C LED283.C LED284.C LED285.C LED286.C LED287.C LED288.C Q10.3
X10: LED289.C LED290.C LED291.C LED292.C LED293.C LED294.C LED295.C LED296.C LED297.C LED298.C LED299.C LED300.C LED301.C LED302.C LED303.C LED304.C LED305.C LED306.C LED307.C LED308.C LED309.C LED310.C LED311.C LED312.C LED313.C LED314.C LED315.C LED316.C LED317.C LED318.C LED319.C LED320.C Q11.3
X11: LED321.C LED322.C LED323.C LED324.C LED325.C LED326.C LED327.C LED328.C LED329.C LED330.C LED331.C LED332.C LED333.C LED334.C LED335.C LED336.C LED337.C LED338.C LED339.C LED340.C LED341.C LED342.C LED343.C LED344.C LED345.C LED346.C LED347.C LED348.C LED349.C LED350.C LED351.C LED352.C Q12.3
X12: LED353.C LED354.C LED355.C LED356.C LED357.C LED358.C LED359.C LED360.C LED361.C LED362.C LED363.C LED364.C LED365.C LED366.C LED367.C LED368.C LED369.C LED370.C LED371.C LED372.C LED373.C LED374.C LED375.C LED376.C LED377.C LED378.C LED379.C LED380.C LED381.C LED382.C LED383.C LED384.C Q13.3

## Tracks (layer width: path | path; a pad name or v marks a point on that pad's centre or on a via)
/OE  (via drill 0.3, 0.35)
  Top 0.152: v12.38,28.26 v20.95,28.26 v29.53,28.26 v35.24,28.26 v58.1,28.26 v80.96,28.26 | U1.9 34.35,2.6 34.29,2.54 v29.84,2.54 | v20.95,30.48 R47.2
  Bottom 0.152: IC1.13 v12.38,28.26 | v80.96,28.26 IC6.13 | IC3.13 v58.1,28.26 | IC2.13 v35.24,28.26 | v29.84,2.54 29.84,27.94 v29.53,28.26 | v20.95,28.26 v20.95,30.48
BRCK  (via drill 0.3)
  Top 0.152: U1.14 38.35,5.33 v39.05,6.03 | v45.4,16.51 59.73,16.51 RCK.1
  Bottom 0.152: v39.05,6.03 41.59,6.03 45.4,9.84 v45.4,16.51
BSCK  (via drill 0.3)
  Top 0.152: U1.13 37.55,1.82 37.78,1.59 45.47,1.59 45.81,1.93 46.9,1.93 47.46,1.37 v54.29,1.37
  Bottom 0.152: v54.29,1.37 54.29,18.62 SCK.1
BSER  (via drill 0.3)
  Top 0.152: v46.35,1.37 46.08,1.09 37.15,1.09 36.75,1.49 U1.12
  Bottom 0.152: v46.35,1.37 48.58,3.59 48.58,18.1 48.02,18.66 SER.1
BTN  (via drill 0.3)
  Top 0.152: BTN.2 34.57,25.12 v34.92,24.77 | v34.61,14.29 34.35,14.03 U1.32
  Bottom 0.152: v34.92,24.77 34.92,14.61 v34.61,14.29
C1  (via drill 0.3, 0.35)
  Top 0.203: v3.81,95.25 2.76,95.25 LED1.A | LED33.A 3.71,91.03 v3.81,91.12 | v3.81,46.67 2.64,46.67 LED353.A R1.2 | LED321.A 3.71,51.02 v3.81,51.12 | LED289.A 3.71,55.47 v3.81,55.56 | LED257.A 3.71,59.91 v3.81,60.01 | LED225.A 3.71,64.36 v3.81,64.45 | LED193.A 3.71,68.8 v3.81,68.9 | LED161.A 3.71,73.25 v3.81,73.34 | LED129.A 3.71,77.69 v3.81,77.79 | LED97.A 3.71,82.14 v3.81,82.23 | LED65.A 3.71,86.58 v3.81,86.68
  Bottom 0.203: v3.81,46.67 v3.81,51.12 v3.81,55.56 v3.81,60.01 v3.81,64.45 v3.81,68.9 v3.81,73.34 v3.81,77.79 v3.81,82.23 v3.81,86.68 v3.81,91.12 v3.81,95.25
C2  (via drill 0.3)
  Top 0.203: v6.67,95.25 5.62,95.25 LED2.A | LED34.A 6.45,91.03 v6.67,90.81 | LED66.A 5.62,86.36 v6.67,86.36 | LED98.A 5.62,81.92 v6.67,81.92 | LED130.A 5.62,77.47 v6.67,77.47 | LED162.A 6.45,73.25 v6.67,73.03 | LED194.A 6.45,68.8 v6.67,68.58 | LED226.A 6.45,64.36 v6.67,64.14 | LED258.A 6.45,59.91 v6.67,59.69 | LED290.A 6.45,55.47 v6.67,55.24 | LED322.A 6.45,51.02 v6.67,50.8 | v6.67,46.67 6.54,46.67 6.45,46.58 LED354.A R2.2
  Bottom 0.203: v6.67,46.67 v6.67,50.8 v6.67,55.24 v6.67,59.69 v6.67,64.14 v6.67,68.58 v6.67,73.03 v6.67,77.47 v6.67,81.92 v6.67,86.36 v6.67,90.81 v6.67,95.25
C3  (via drill 0.3)
  Top 0.203: LED3.A 9.3,95.47 v9.53,95.25 | LED35.A 9.3,91.03 v9.53,90.81 | LED67.A 9.3,86.58 v9.53,86.36 | LED99.A 9.3,82.14 v9.53,81.92 | LED131.A 9.3,77.69 v9.53,77.47 | LED163.A 9.3,73.25 v9.53,73.03 | LED195.A 9.3,68.8 v9.53,68.58 | LED227.A 9.3,64.36 v9.53,64.14 | LED259.A 9.3,59.91 v9.53,59.69 | LED291.A 9.3,55.47 v9.53,55.24 | LED323.A 9.3,51.02 v9.53,50.8 | v9.53,46.67 9.4,46.67 9.3,46.58 LED355.A R3.2
  Bottom 0.203: v9.53,46.67 v9.53,50.8 v9.53,55.24 v9.53,59.69 v9.53,64.14 v9.53,68.58 v9.53,73.03 v9.53,77.47 v9.53,81.92 v9.53,86.36 v9.53,90.81 v9.53,95.25
C4  (via drill 0.3)
  Top 0.203: LED4.A 12.16,95.47 v12.38,95.25 | LED36.A 12.16,91.03 v12.38,90.81 | LED68.A 12.16,86.58 v12.38,86.36 | LED100.A 12.16,82.14 v12.38,81.92 | LED132.A 12.16,77.69 v12.38,77.47 | LED164.A 12.16,73.25 v12.38,73.03 | LED196.A 12.16,68.8 v12.38,68.58 | LED228.A 12.16,64.36 v12.38,64.14 | LED260.A 12.16,59.91 v12.38,59.69 | LED292.A 12.16,55.47 v12.38,55.24 | LED324.A 12.16,51.02 v12.38,50.8 | v12.38,46.67 12.26,46.67 12.16,46.58 LED356.A R4.2
  Bottom 0.203: v12.38,46.67 v12.38,50.8 v12.38,55.24 v12.38,59.69 v12.38,64.14 v12.38,68.58 v12.38,73.03 v12.38,77.47 v12.38,81.92 v12.38,86.36 v12.38,90.81 v12.38,95.25
C5  (via drill 0.3)
  Top 0.203: LED5.A 15.02,95.47 v15.24,95.25 | LED37.A 15.02,91.03 v15.24,90.81 | LED69.A 15.02,86.58 v15.24,86.36 | LED101.A 15.02,82.14 v15.24,81.92 | LED133.A 15.02,77.69 v15.24,77.47 | LED165.A 15.02,73.25 v15.24,73.03 | LED197.A 15.02,68.8 v15.24,68.58 | LED229.A 15.02,64.36 v15.24,64.14 | LED261.A 15.02,59.91 v15.24,59.69 | LED293.A 15.02,55.47 v15.24,55.24 | LED325.A 15.02,51.02 v15.24,50.8 | v15.24,46.67 15.12,46.67 15.02,46.58 LED357.A R5.2
  Bottom 0.203: v15.24,46.67 v15.24,50.8 v15.24,55.24 v15.24,59.69 v15.24,64.14 v15.24,68.58 v15.24,73.03 v15.24,77.47 v15.24,81.92 v15.24,86.36 v15.24,90.81 v15.24,95.25
C6  (via drill 0.3)
  Top 0.203: LED6.A 17.88,95.47 v18.1,95.25 | LED38.A 17.88,91.03 v18.1,90.81 | LED70.A 17.88,86.58 v18.1,86.36 | LED102.A 17.88,82.14 v18.1,81.92 | LED134.A 17.88,77.69 v18.1,77.47 | LED166.A 17.88,73.25 v18.1,73.03 | LED198.A 17.88,68.8 v18.1,68.58 | LED230.A 17.88,64.36 v18.1,64.14 | LED262.A 17.88,59.91 v18.1,59.69 | LED294.A 17.88,55.47 v18.1,55.24 | LED326.A 17.88,51.02 v18.1,50.8 | v18.1,46.67 17.98,46.67 17.88,46.58 LED358.A R6.2
  Bottom 0.203: v18.1,46.67 v18.1,50.8 v18.1,55.24 v18.1,59.69 v18.1,64.14 v18.1,68.58 v18.1,73.03 v18.1,77.47 v18.1,81.92 v18.1,86.36 v18.1,90.81 v18.1,95.25
C7  (via drill 0.3)
  Top 0.203: LED7.A 20.73,95.47 v20.95,95.25 | LED39.A 20.73,91.03 v20.95,90.81 | LED71.A 20.73,86.58 v20.95,86.36 | LED103.A 20.73,82.14 v20.95,81.92 | LED135.A 20.73,77.69 v20.95,77.47 | LED167.A 20.73,73.25 v20.95,73.03 | LED199.A 20.73,68.8 v20.95,68.58 | LED231.A 20.73,64.36 v20.95,64.14 | LED263.A 20.73,59.91 v20.95,59.69 | LED295.A 20.73,55.47 v20.95,55.24 | LED327.A 20.73,51.02 v20.95,50.8 | v20.95,46.67 20.83,46.67 20.73,46.58 LED359.A R7.2
  Bottom 0.203: v20.95,46.67 v20.95,50.8 v20.95,55.24 v20.95,59.69 v20.95,64.14 v20.95,68.58 v20.95,73.03 v20.95,77.47 v20.95,81.92 v20.95,86.36 v20.95,90.81 v20.95,95.25
C8  (via drill 0.3)
  Top 0.203: LED40.A 23.59,91.03 v23.81,90.81 | LED8.A 23.59,95.47 v23.81,95.25 | LED72.A 23.59,86.58 v23.81,86.36 | LED104.A 23.59,82.14 v23.81,81.92 | LED136.A 23.59,77.69 v23.81,77.47 | LED168.A 23.59,73.25 v23.81,73.03 | LED200.A 23.59,68.8 v23.81,68.58 | LED232.A 23.59,64.36 v23.81,64.14 | LED264.A 23.59,59.91 v23.81,59.69 | LED296.A 23.59,55.47 v23.81,55.24 | LED328.A 23.59,51.02 v23.81,50.8 | v23.81,46.67 23.69,46.67 23.59,46.58 LED360.A R8.2
  Bottom 0.203: v23.81,46.67 v23.81,50.8 v23.81,55.24 v23.81,59.69 v23.81,64.14 v23.81,68.58 v23.81,73.03 v23.81,77.47 v23.81,81.92 v23.81,86.36 v23.81,90.81 v23.81,95.25
C9  (via drill 0.3)
  Top 0.203: LED9.A 26.45,95.47 v26.67,95.25 | LED41.A 26.45,91.03 v26.67,90.81 | LED73.A 26.45,86.58 v26.67,86.36 | LED105.A 26.45,82.14 v26.67,81.92 | LED137.A 26.45,77.69 v26.67,77.47 | LED169.A 26.45,73.25 v26.67,73.03 | LED201.A 26.45,68.8 v26.67,68.58 | LED233.A 26.45,64.36 v26.67,64.14 | LED265.A 26.45,59.91 v26.67,59.69 | LED297.A 26.45,55.47 v26.67,55.24 | LED329.A 26.45,51.02 v26.67,50.8 | v26.67,46.67 26.55,46.67 26.45,46.58 LED361.A R9.2
  Bottom 0.203: v26.67,46.67 v26.67,50.8 v26.67,55.24 v26.67,59.69 v26.67,64.14 v26.67,68.58 v26.67,73.03 v26.67,77.47 v26.67,81.92 v26.67,86.36 v26.67,90.81 v26.67,95.25
C10  (via drill 0.3)
  Top 0.203: LED10.A 29.31,95.47 v29.53,95.25 | LED42.A 29.31,91.03 v29.53,90.81 | LED74.A 29.31,86.58 v29.53,86.36 | LED106.A 29.31,82.14 v29.53,81.92 | LED138.A 29.31,77.69 v29.53,77.47 | LED170.A 29.31,73.25 v29.53,73.03 | LED202.A 29.31,68.8 v29.53,68.58 | LED234.A 29.31,64.36 v29.53,64.14 | LED298.A 29.31,55.47 v29.53,55.24 | LED266.A 29.31,59.91 v29.53,59.69 | LED330.A 29.31,51.02 v29.53,50.8 | v29.53,46.67 29.41,46.67 29.31,46.58 LED362.A R10.2
  Bottom 0.203: v29.53,46.67 v29.53,50.8 v29.53,55.24 v29.53,59.69 v29.53,64.14 v29.53,68.58 v29.53,73.03 v29.53,77.47 v29.53,81.92 v29.53,86.36 v29.53,90.81 v29.53,95.25
C11  (via drill 0.3)
  Top 0.203: LED43.A 32.16,91.03 v32.38,90.81 | LED11.A 32.16,95.47 v32.38,95.25 | LED75.A 32.16,86.58 v32.38,86.36 | LED107.A 32.16,82.14 v32.38,81.92 | LED139.A 32.16,77.69 v32.38,77.47 | LED171.A 32.16,73.25 v32.38,73.03 | LED203.A 32.16,68.8 v32.38,68.58 | LED235.A 32.16,64.36 v32.38,64.14 | LED267.A 32.16,59.91 v32.38,59.69 | LED299.A 32.16,55.47 v32.38,55.24 | LED331.A 32.16,51.02 v32.38,50.8 | v32.38,46.67 32.26,46.67 32.16,46.58 LED363.A R11.2
  Bottom 0.203: v32.38,46.67 v32.38,50.8 v32.38,55.24 v32.38,59.69 v32.38,64.14 v32.38,68.58 v32.38,73.03 v32.38,77.47 v32.38,81.92 v32.38,86.36 v32.38,90.81 v32.38,95.25
C12  (via drill 0.3)
  Top 0.203: LED12.A 35.02,95.47 v35.24,95.25 | LED44.A 35.02,91.03 v35.24,90.81 | LED76.A 35.02,86.58 v35.24,86.36 | LED108.A 35.02,82.14 v35.24,81.92 | LED140.A 35.02,77.69 v35.24,77.47 | LED172.A 35.02,73.25 v35.24,73.03 | LED204.A 35.02,68.8 v35.24,68.58 | LED236.A 35.02,64.36 v35.24,64.14 | LED268.A 35.02,59.91 v35.24,59.69 | LED300.A 35.02,55.47 v35.24,55.24 | LED332.A 35.02,51.02 v35.24,50.8 | v35.24,46.67 35.12,46.67 35.02,46.58 LED364.A R12.2
  Bottom 0.203: v35.24,46.67 v35.24,50.8 v35.24,55.24 v35.24,59.69 v35.24,64.14 v35.24,68.58 v35.24,73.03 v35.24,77.47 v35.24,81.92 v35.24,86.36 v35.24,90.81 v35.24,95.25
C13  (via drill 0.3)
  Top 0.203: LED13.A 37.05,95.25 v38.1,95.25 | LED45.A 37.88,91.03 v38.1,90.81 | LED77.A 37.88,86.58 v38.1,86.36 | LED109.A 37.88,82.14 v38.1,81.92 | LED141.A 37.88,77.69 v38.1,77.47 | LED173.A 37.88,73.25 v38.1,73.03 | LED205.A 37.88,68.8 v38.1,68.58 | LED237.A 37.88,64.36 v38.1,64.14 | LED269.A 37.88,59.91 v38.1,59.69 | LED301.A 37.88,55.47 v38.1,55.24 | v38.1,46.67 37.98,46.67 37.88,46.58 LED365.A R13.2 | LED333.A 37.88,51.02 v38.1,50.8
  Bottom 0.203: v38.1,46.67 v38.1,50.8 v38.1,55.24 v38.1,59.69 v38.1,64.14 v38.1,68.58 v38.1,73.03 v38.1,77.47 v38.1,81.92 v38.1,86.36 v38.1,90.81 v38.1,95.25
C14  (via drill 0.3)
  Top 0.203: LED14.A 40.74,95.47 v40.96,95.25 | LED78.A 40.74,86.58 v40.96,86.36 | LED110.A 40.74,82.14 v40.96,81.92 | LED46.A 40.74,91.03 v40.96,90.81 | LED142.A 40.74,77.69 v40.96,77.47 | LED174.A 40.74,73.25 v40.96,73.03 | LED206.A 40.74,68.8 v40.96,68.58 | LED238.A 40.74,64.36 v40.96,64.14 | LED270.A 40.74,59.91 v40.96,59.69 | LED302.A 40.74,55.47 v40.96,55.24 | LED334.A 40.74,51.02 v40.96,50.8 | v40.96,46.67 40.84,46.67 40.74,46.58 LED366.A R14.2
  Bottom 0.203: v40.96,46.67 v40.96,50.8 v40.96,55.24 v40.96,59.69 v40.96,64.14 v40.96,68.58 v40.96,73.03 v40.96,77.47 v40.96,81.92 v40.96,86.36 v40.96,90.81 v40.96,95.25
C15  (via drill 0.3)
  Top 0.203: LED15.A 43.59,95.47 v43.81,95.25 | LED79.A 43.59,86.58 v43.81,86.36 | LED111.A 43.59,82.14 v43.81,81.92 | LED47.A 43.59,91.03 v43.81,90.81 | LED143.A 43.59,77.69 v43.81,77.47 | LED175.A 43.59,73.25 v43.81,73.03 | LED207.A 43.59,68.8 v43.81,68.58 | LED239.A 43.59,64.36 v43.81,64.14 | LED271.A 43.59,59.91 v43.81,59.69 | LED303.A 43.59,55.47 v43.81,55.24 | LED335.A 43.59,51.02 v43.81,50.8 | v43.81,46.67 43.69,46.67 43.59,46.58 LED367.A R15.2
  Bottom 0.203: v43.81,46.67 v43.81,50.8 v43.81,55.24 v43.81,59.69 v43.81,64.14 v43.81,68.58 v43.81,73.03 v43.81,77.47 v43.81,81.92 v43.81,86.36 v43.81,90.81 v43.81,95.25
C16  (via drill 0.3)
  Top 0.203: LED16.A 46.45,95.47 v46.67,95.25 | LED48.A 46.45,91.03 v46.67,90.81 | LED80.A 46.45,86.58 v46.67,86.36 | LED112.A 46.45,82.14 v46.67,81.92 | LED144.A 46.45,77.69 v46.67,77.47 | LED176.A 46.45,73.25 v46.67,73.03 | LED208.A 46.45,68.8 v46.67,68.58 | LED240.A 46.45,64.36 v46.67,64.14 | LED272.A 46.45,59.91 v46.67,59.69 | LED304.A 46.45,55.47 v46.67,55.24 | v46.67,46.67 46.55,46.67 46.45,46.58 LED368.A R16.2 | LED336.A 46.45,51.02 v46.67,50.8
  Bottom 0.203: v46.67,46.67 v46.67,50.8 v46.67,55.24 v46.67,59.69 v46.67,64.14 v46.67,68.58 v46.67,73.03 v46.67,77.47 v46.67,81.92 v46.67,86.36 v46.67,90.81 v46.67,95.25
C17  (via drill 0.3)
  Top 0.203: LED17.A 49.31,95.47 v49.53,95.25 | LED49.A 49.31,91.03 v49.53,90.81 | LED81.A 49.31,86.58 v49.53,86.36 | LED113.A 49.31,82.14 v49.53,81.92 | LED145.A 49.31,77.69 v49.53,77.47 | LED177.A 49.31,73.25 v49.53,73.03 | LED209.A 49.31,68.8 v49.53,68.58 | LED241.A 49.31,64.36 v49.53,64.14 | LED273.A 49.31,59.91 v49.53,59.69 | LED305.A 49.31,55.47 v49.53,55.24 | LED337.A 49.31,51.02 v49.53,50.8 | v49.53,46.67 49.41,46.67 49.31,46.58 LED369.A R17.2
  Bottom 0.203: v49.53,46.67 v49.53,50.8 v49.53,55.24 v49.53,59.69 v49.53,64.14 v49.53,68.58 v49.53,73.03 v49.53,77.47 v49.53,81.92 v49.53,86.36 v49.53,90.81 v49.53,95.25
C18  (via drill 0.3)
  Top 0.203: LED18.A 52.17,95.47 v52.39,95.25 | LED50.A 52.17,91.03 v52.39,90.81 | LED82.A 52.17,86.58 v52.39,86.36 | LED114.A 52.17,82.14 v52.39,81.92 | LED146.A 52.17,77.69 v52.39,77.47 | LED178.A 52.17,73.25 v52.39,73.03 | LED210.A 52.17,68.8 v52.39,68.58 | LED242.A 52.17,64.36 v52.39,64.14 | LED274.A 52.17,59.91 v52.39,59.69 | LED306.A 52.17,55.47 v52.39,55.24 | v52.39,46.67 52.27,46.67 52.17,46.58 LED370.A R18.2 | LED338.A 52.17,51.02 v52.39,50.8
  Bottom 0.203: v52.39,46.67 v52.39,50.8 v52.39,55.24 v52.39,59.69 v52.39,64.14 v52.39,68.58 v52.39,73.03 v52.39,77.47 v52.39,81.92 v52.39,86.36 v52.39,90.81 v52.39,95.25
C19  (via drill 0.3)
  Top 0.203: LED19.A 55.02,95.47 v55.24,95.25 | LED51.A 55.02,91.03 v55.24,90.81 | LED83.A 55.02,86.58 v55.24,86.36 | LED115.A 55.02,82.14 v55.24,81.92 | LED147.A 55.02,77.69 v55.24,77.47 | LED179.A 55.02,73.25 v55.24,73.03 | LED211.A 55.02,68.8 v55.24,68.58 | LED243.A 55.02,64.36 v55.24,64.14 | LED275.A 55.02,59.91 v55.24,59.69 | LED307.A 55.02,55.47 v55.24,55.24 | LED339.A 55.02,51.02 v55.24,50.8 | v55.24,46.67 55.12,46.67 55.02,46.58 LED371.A R19.2
  Bottom 0.203: v55.24,46.67 v55.24,50.8 v55.24,55.24 v55.24,59.69 v55.24,64.14 v55.24,68.58 v55.24,73.03 v55.24,77.47 v55.24,81.92 v55.24,86.36 v55.24,90.81 v55.24,95.25
C20  (via drill 0.3)
  Top 0.203: LED20.A 57.88,95.47 v58.1,95.25 | LED84.A 57.88,86.58 v58.1,86.36 | LED52.A 57.88,91.03 v58.1,90.81 | LED116.A 57.88,82.14 v58.1,81.92 | LED148.A 57.88,77.69 v58.1,77.47 | LED180.A 57.88,73.25 v58.1,73.03 | LED212.A 57.88,68.8 v58.1,68.58 | LED244.A 57.88,64.36 v58.1,64.14 | LED308.A 57.88,55.47 v58.1,55.24 | LED276.A 57.88,59.91 v58.1,59.69 | v58.1,46.67 57.98,46.67 57.88,46.58 LED372.A R20.2 | LED340.A 57.88,51.02 v58.1,50.8
  Bottom 0.203: v58.1,46.67 v58.1,50.8 v58.1,55.24 v58.1,59.69 v58.1,64.14 v58.1,68.58 v58.1,73.03 v58.1,77.47 v58.1,81.92 v58.1,86.36 v58.1,90.81 v58.1,95.25
C21  (via drill 0.3)
  Top 0.203: LED21.A 60.74,95.47 v60.96,95.25 | LED53.A 60.74,91.03 v60.96,90.81 | LED85.A 60.74,86.58 v60.96,86.36 | LED117.A 60.74,82.14 v60.96,81.92 | LED149.A 60.74,77.69 v60.96,77.47 | LED181.A 60.74,73.25 v60.96,73.03 | LED213.A 60.74,68.8 v60.96,68.58 | LED245.A 60.74,64.36 v60.96,64.14 | LED277.A 60.74,59.91 v60.96,59.69 | LED309.A 60.74,55.47 v60.96,55.24 | LED341.A 60.74,51.02 v60.96,50.8 | v60.96,46.67 60.84,46.67 60.74,46.58 LED373.A R21.2
  Bottom 0.203: v60.96,46.67 v60.96,50.8 v60.96,55.24 v60.96,59.69 v60.96,64.14 v60.96,68.58 v60.96,73.03 v60.96,77.47 v60.96,81.92 v60.96,86.36 v60.96,90.81 v60.96,95.25
C22  (via drill 0.3)
  Top 0.203: LED22.A 63.6,95.47 v63.82,95.25 | LED54.A 63.6,91.03 v63.82,90.81 | LED86.A 63.6,86.58 v63.82,86.36 | LED118.A 63.6,82.14 v63.82,81.92 | LED150.A 63.6,77.69 v63.82,77.47 | LED182.A 63.6,73.25 v63.82,73.03 | LED214.A 63.6,68.8 v63.82,68.58 | LED246.A 63.6,64.36 v63.82,64.14 | LED278.A 63.6,59.91 v63.82,59.69 | LED310.A 63.6,55.47 v63.82,55.24 | LED342.A 63.6,51.02 v63.82,50.8 | v63.82,46.67 63.7,46.67 63.6,46.58 LED374.A R22.2
  Bottom 0.203: v63.82,46.67 v63.82,50.8 v63.82,55.24 v63.82,59.69 v63.82,64.14 v63.82,68.58 v63.82,73.03 v63.82,77.47 v63.82,81.92 v63.82,86.36 v63.82,90.81 v63.82,95.25
C23  (via drill 0.3)
  Top 0.203: LED23.A 66.45,95.47 v66.67,95.25 | LED55.A 66.45,91.03 v66.67,90.81 | LED87.A 66.45,86.58 v66.67,86.36 | LED119.A 66.45,82.14 v66.67,81.92 | LED151.A 66.45,77.69 v66.67,77.47 | LED183.A 66.45,73.25 v66.67,73.03 | LED215.A 66.45,68.8 v66.67,68.58 | LED247.A 66.45,64.36 v66.67,64.14 | LED279.A 66.45,59.91 v66.67,59.69 | LED311.A 66.45,55.47 v66.67,55.24 | LED343.A 66.45,51.02 v66.67,50.8 | v66.67,46.67 66.55,46.67 66.45,46.58 LED375.A R23.2
  Bottom 0.203: v66.67,46.67 v66.67,50.8 v66.67,55.24 v66.67,59.69 v66.67,64.14 v66.67,68.58 v66.67,73.03 v66.67,77.47 v66.67,81.92 v66.67,86.36 v66.67,90.81 v66.67,95.25
C24  (via drill 0.3)
  Top 0.203: LED24.A 69.31,95.47 v69.53,95.25 | LED56.A 69.31,91.03 v69.53,90.81 | LED88.A 69.31,86.58 v69.53,86.36 | LED120.A 69.31,82.14 v69.53,81.92 | LED152.A 69.31,77.69 v69.53,77.47 | LED184.A 69.31,73.25 v69.53,73.03 | LED216.A 69.31,68.8 v69.53,68.58 | LED248.A 69.31,64.36 v69.53,64.14 | LED280.A 69.31,59.91 v69.53,59.69 | LED312.A 69.31,55.47 v69.53,55.24 | v69.53,46.67 69.41,46.67 69.31,46.58 LED376.A R24.2 | LED344.A 69.31,51.02 v69.53,50.8
  Bottom 0.203: v69.53,46.67 v69.53,50.8 v69.53,55.24 v69.53,59.69 v69.53,64.14 v69.53,68.58 v69.53,73.03 v69.53,77.47 v69.53,81.92 v69.53,86.36 v69.53,90.81 v69.53,95.25
C25  (via drill 0.3, 0.35)